# Altium PCB Brake Switch.PcbDoc
Units mil, origin at the board's own origin, x right, y up, seen from the top; angles counter-clockwise.
Board outline 1285 x 1425 mil, 2 copper layers (Top Layer, Bottom Layer); 3 components, 5 nets, 15 pads, 2 vias.
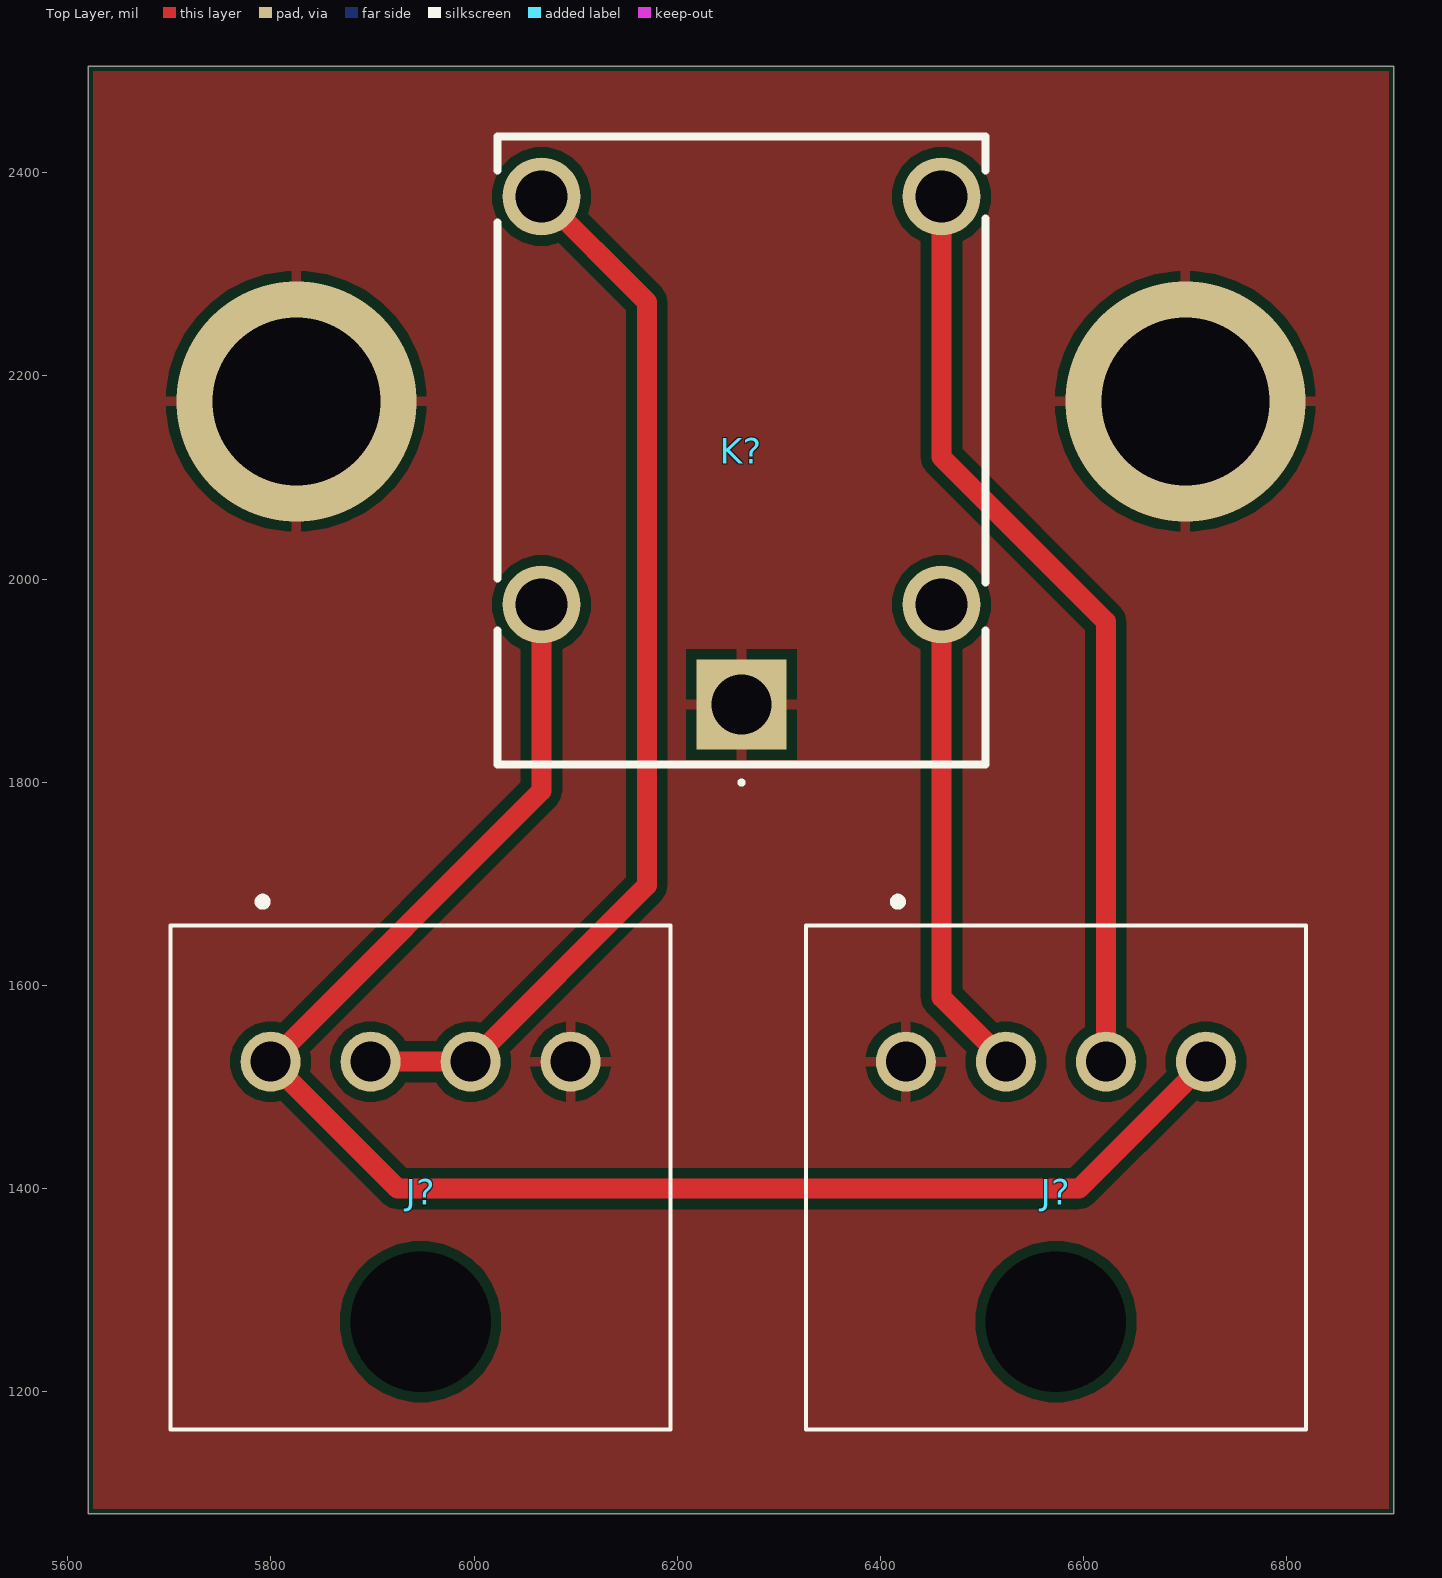
[diagram p0: Top Layer view]
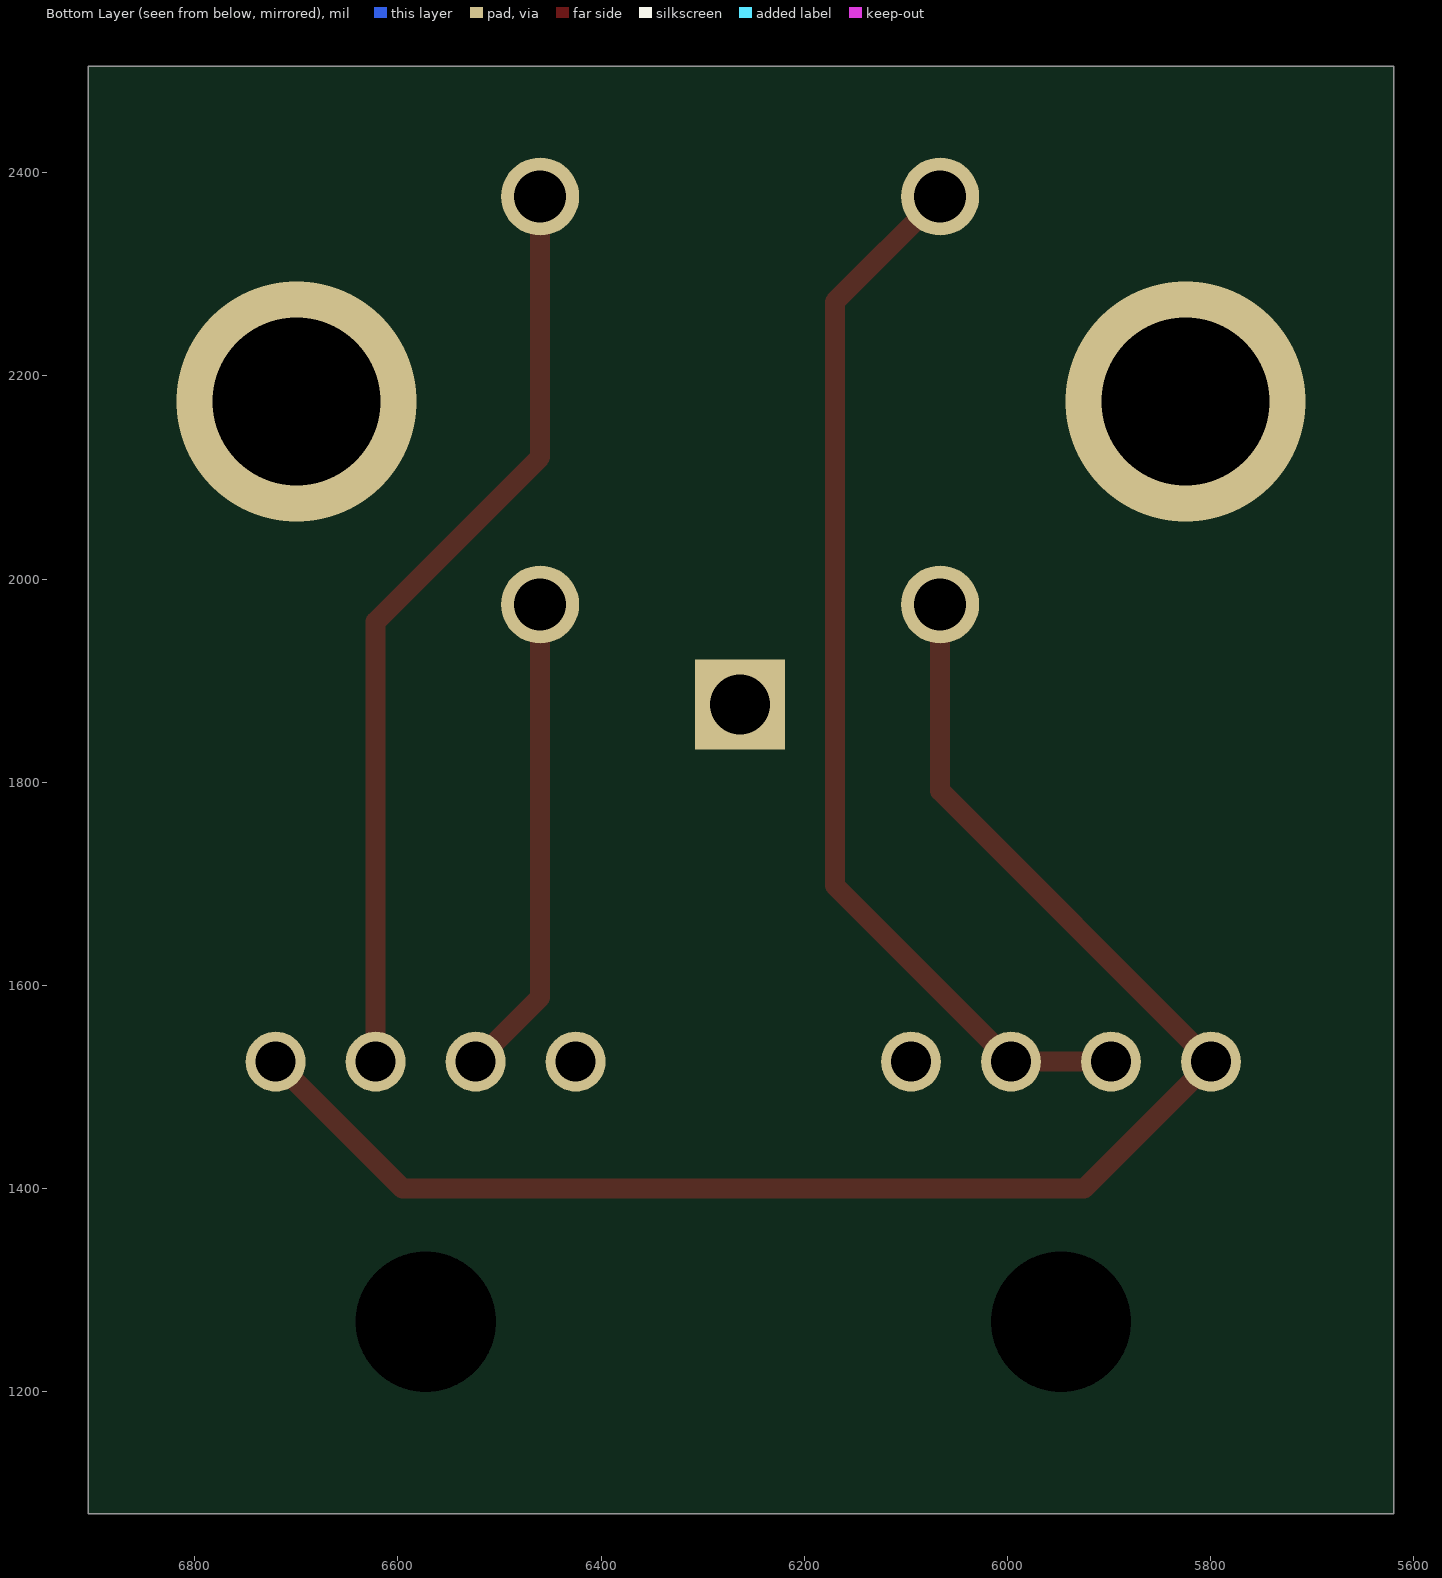
[diagram p1: Bottom Layer view, seen from below]
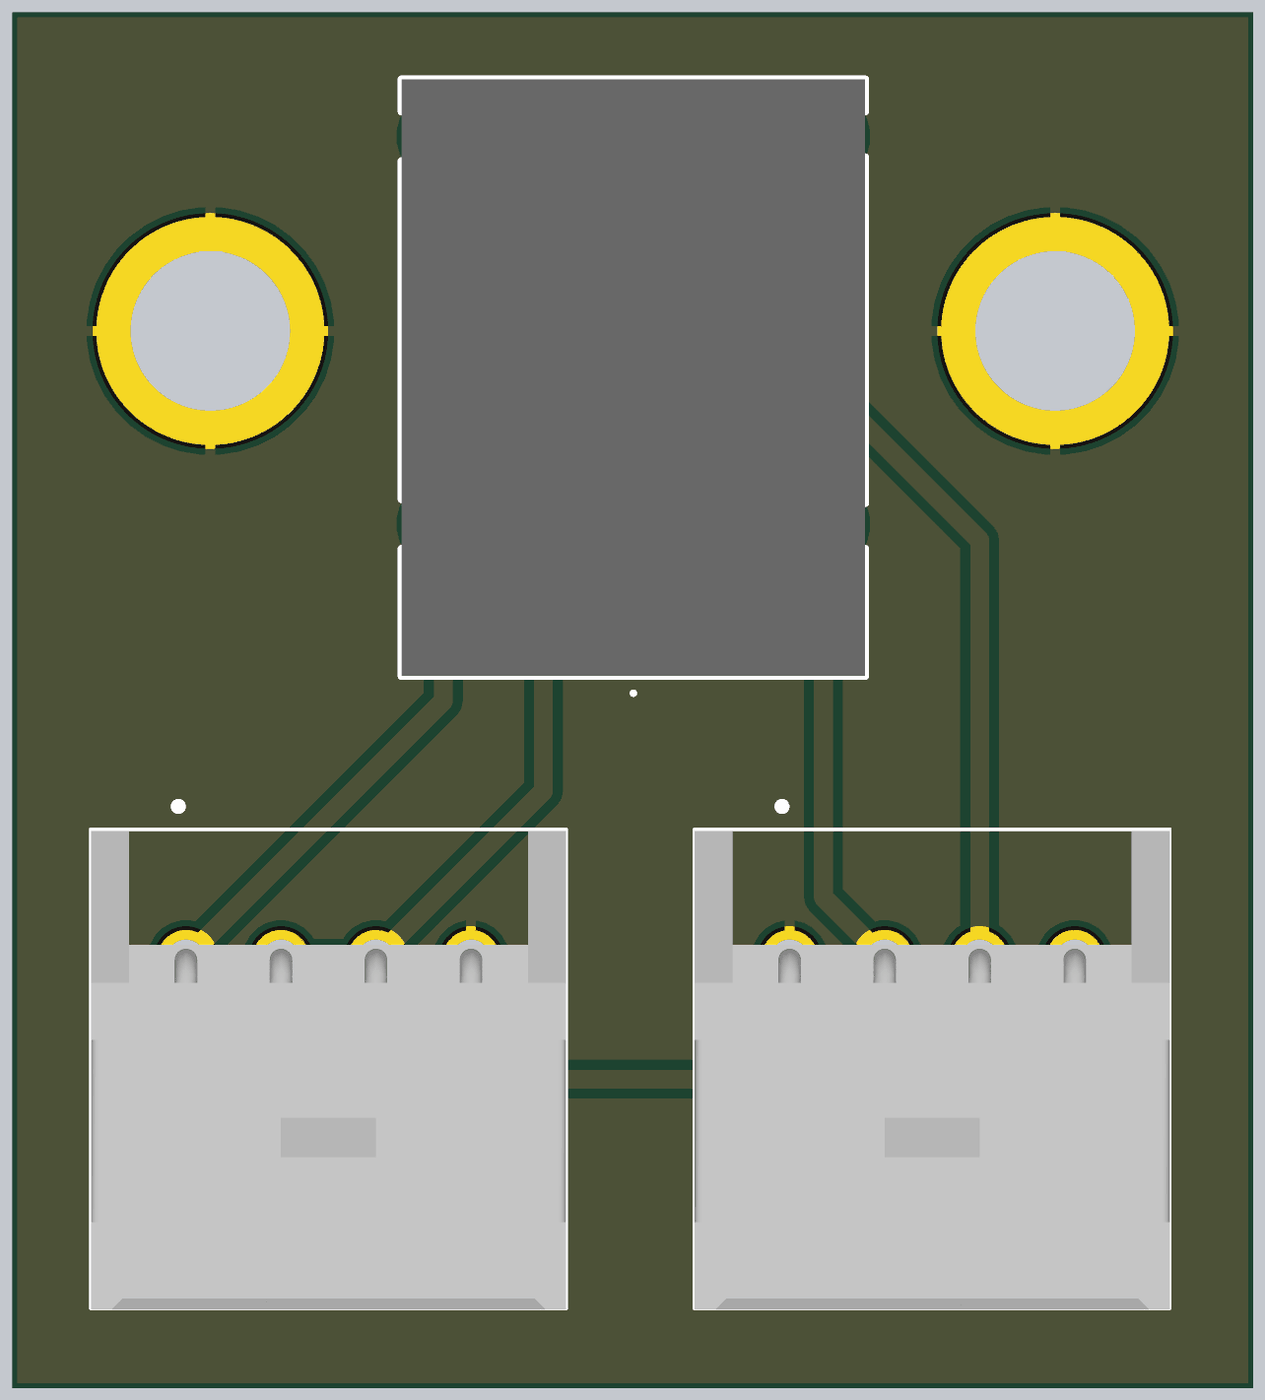
[diagram p2: 3D render of the assembled board from above, using the file's embedded part models]

## Layer stack, top to bottom
Top Solder: solder mask 0.4, Solder Resist, Dk 3.5
Top Layer: signal copper 1.4
Dielectric 1: dielectric 12.6, FR-4, Dk 4.8
Bottom Layer: signal copper 1.4
Bottom Solder: solder mask 0.4, Solder Resist, Dk 3.5

## Board outline
5620,1080 6905,1080 6905,2505 5620,2505

## Design rules (kind name [scope] priority, off if disabled: settings)
Clearance [All] p1: gap=10 ignorepadtopadclearanceinfootprint=FALSE except(0: Arc-Hole Track-Hole SMDPad-Hole THPad-Hole Via-Hole Fill-Hole Poly-Hole Region-Hole Text-Hole)
PolygonConnect [All] p1: connectstyle=Relief reliefconductorwidth=10 reliefentries=4 polygonreliefangle="90 Angle" airgapwidth=10
RoutingVias [All] p1: holewidth=19.68 width=23.62 viastyle="Through Hole" minholewidth=19.68 minwidth=23.62 maxholewidth=19.68 maxwidth=23.62
SolderMaskExpansion [All] p1: expansion=4 istentingtop=FALSE
Width [All] p1: maxlimit=19.68 minlimit=19.68 preferedwidth=19.68 minimp=50.000000 maximp=50.000000 favimp=50.000000
30 further rules are at their usual default settings.

## Classes and differential pairs
component class "Brake Switch": J? K?

## Components (designator, comment, footprint, x,y, rotation, side; value= is the part's Value field where it differs from the comment)
J? "1744426-4" 17444264 6425,1525 r180 top
J? "1744426-4" 17444264 5799.72,1525 r180 top
K? "SCA20-20-12VDC-C" SCA202012VDCC 6263.15,1876.57 r270 top

## Footprints (in the part's own frame and the unit in brackets; to place one, negate y for a bottom-side part, rotate by r counter-clockwise, add the part's x,y. Pads: shape width x height; smd on the part's side, far side on the other; paste and mask are expansions set on the pad)
17444264 [mm]
  round 1.5 hole 1: 1(0,0) 2(-2.5,0) 3(-5,0) 4(-7.5,0)
  round 1.755 hole 3.51 unplated: MH1(-3.75,6.5)
  silkscreen extent -10,-4.1 2.5,9.2, body extent -10,-3.36 2.5,9.24, height 7.49
SCA202012VDCC [mm]
  rect 2.25x2.25 hole 1.5: 1(0,0)
  round 1.95 hole 1.3: 2(-2.5,5) 3(-12.7,5) 4(-12.7,-5) 5(-2.5,-5)
  silkscreen extent -14.2,-6.1 2,6.1, body extent -14.2,-6.1 1.5,6.1, height 13.8

## Part data
J? J?: "Connector", Manufacturer_Name="TE Connectivity", Mouser Part Number=571-1744426-4, Arrow Part Number=1744426-4, Arrow Price/Stock=https://www.arrow.com/en/products/1744426-4/te-connectivity?region=nac, Datasheet Link=https://www.te.com/commerce/DocumentDelivery/DDEController?Action=showdoc&DocId=Customer+Drawing%7F1744426%7FD2%7Fpdf%7FEnglish%7FENG_CD_1744426_D2.pdf%7F1744426-4, Height=7.8mm, Manufacturer_Part_Number=1744426-4, Mouser Price/Stock=https://www.mouser.co.uk/ProductDetail/TE-Connectivity-AMP/1744426-4?qs=IGPQaF7TU6toTieyWkjyEQ%3D%3D
K?: "Relay or Contactor", Manufacturer_Name=LEONE, Datasheet Link=https://www.kuraelectronics.com/new-pdf/SCA%2020.pdf, Height=13.7mm, Manufacturer_Part_Number=SCA20-20-12VDC-C

## Via types
v1: diameter 236.22, hole 165.35, Top Layer to Bottom Layer, 2 vias

## Nets (pads, with @x,y where several pads share a name; then routed paths per layer and width w, separated by ;. In a path a pad name is that pad's centre, name@x,y a point inside that pad or via, vN(x,y) a via of type N, cw(c..) or ccw(c..) an arc to the next point about the centre after c; other vN are vias at no path point)
+12: J?.1@5799.72,1525 J?.4@6720.28,1525 K?.5 | length 1584.5
  Top Layer w19.68: K?.5 6066.3,1791.57 5799.72,1525 5924.72,1400 6595.28,1400 J?.4@6720.28,1525
BL: J?.3@6621.85,1525 K?.3 | length 918.6
  Top Layer w19.68: K?.3 6460,2120 6621.85,1958.15 J?.3@6621.85,1525
BS: J?.2@6523.43,1525 K?.2 | length 476.3
  Top Layer w19.68: K?.2 6460,1588.43 J?.2@6523.43,1525
DIO: J?.2@5898.15,1525 J?.3@5996.57,1525 K?.4 | length 1064.8
  Top Layer w19.68: J?.2@5898.15,1525 5996.57,1525 6170,1698.43 6170,2272.87 K?.4
GND: J?.1@6425,1525 J?.4@6095,1525 K?.1
  other v1: 5825,2175 6700,2175
pads on no net: J?.MH1

## Polygon pours and split planes (outlines as drawn)
GND on Top Layer "NONET_L-01_P-001" (solid, pour order 0): 5625,2500 6900,2500 6900,1085 5625,1085